# EAGLE board teensyv (EAGLE 6.6.0)
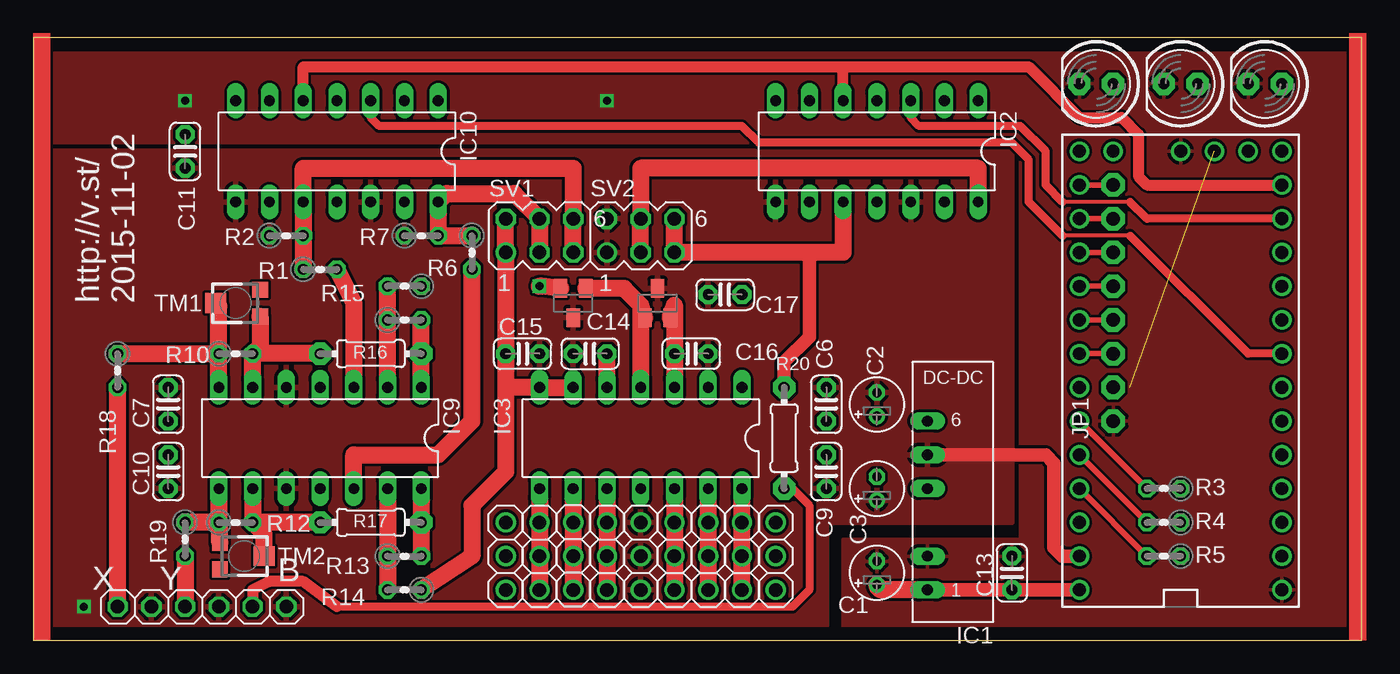
[diagram p0: board, top side]
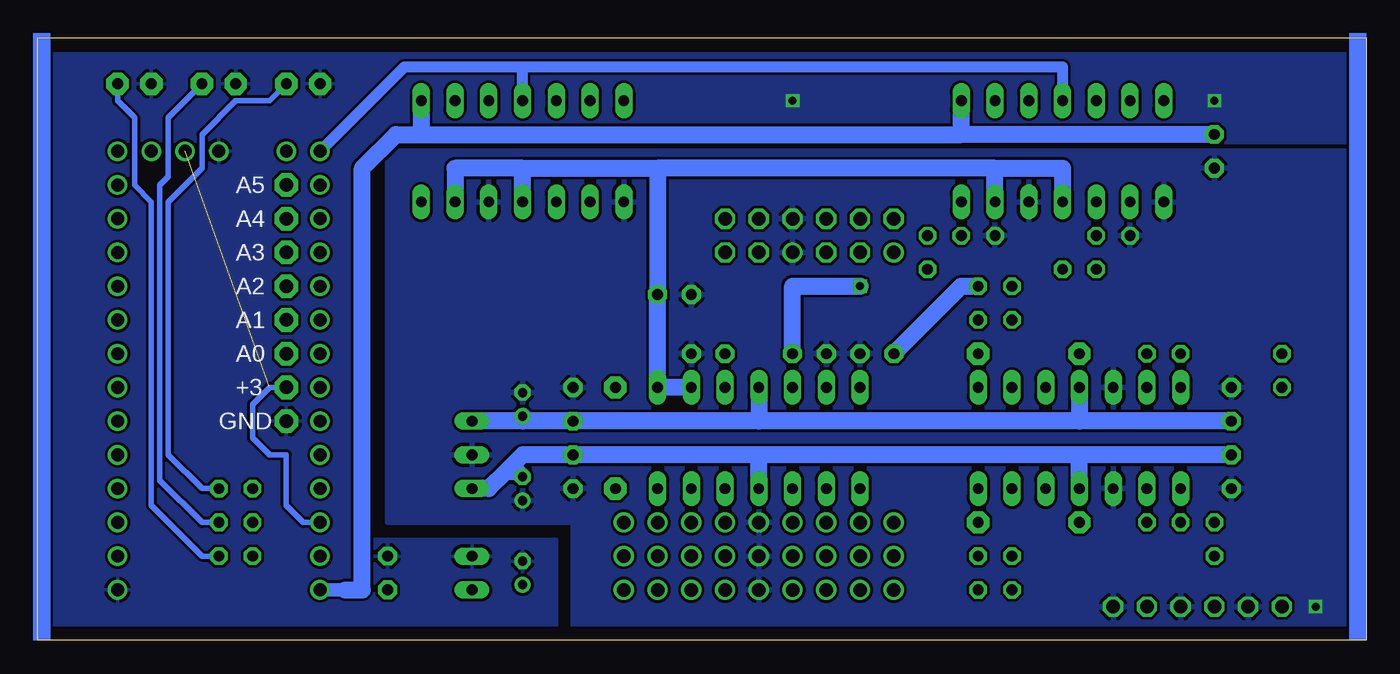
[diagram p1: board, bottom side, seen from below]

Size 100 x 45.39 mm. Coordinates in mm from the lower left corner, seen from the top.
Outline: 0,0 100,0 100,45.39 0,45.39 0,0
Copper layers (1*16): Top 0.035mm / dielectric 1.5mm / Bottom 0.035mm
Design rules "default": minimum track width 10mil, minimum drill 24mil, track to track 8mil, track to pad 8mil, pad to pad 8mil, via to via 8mil, smd to smd 8mil, copper to edge 40mil, drill to drill 8mil, minimum pad ring 10mil, minimum via ring 8mil, stop-mask expansion 4mil, vias tented up to drill 0mil, thermal gap 10mil

## Footprints (pad centres in the part's own frame; a part is rotated, then mirrored left to right if it is on the bottom)
E1,8-4 = drill 0.711 pad 1.168: + -0.889,0 | drill 0.711 pad 1.168 octagon: - 0.889,0
C025-024X044 = drill 0.813 pad 1.422 octagon: 1 -1.27,0; 2 1.27,0
NMA = drill 0.813 long: 1 0,6.35; 2 0,3.81; 4 0,-1.27; 5 0,-3.81; 6 0,-6.35
DIL14 = drill 0.813 long: 1 -7.62,-3.81; 2 -5.08,-3.81; 3 -2.54,-3.81; 4 0,-3.81; 5 2.54,-3.81; 6 5.08,-3.81; 7 7.62,-3.81; 8 7.62,3.81; 9 5.08,3.81; 10 2.54,3.81; 11 0,3.81; 12 -2.54,3.81; 13 -5.08,3.81; 14 -7.62,3.81
SOT23 = smd 1 x 1.4: 1 -0.95,-1.1; 2 0.95,-1.1; 3 0,1.1
1X08-CLEANBIG = drill 1.016 pad 1.778 octagon: 1 -8.89,0; 2 -6.35,0; 3 -3.81,0; 4 -1.27,0; 5 1.27,0; 6 3.81,0; 7 6.35,0; 8 8.89,0
1X03 = drill 1.016: 1 -2.54,0; 2 0,0; 3 2.54,0
LED5MM = drill 0.813 pad 1.676 octagon: A -1.27,0; K 1.27,0
0204V = drill 0.813 octagon: 1 -1.27,0; 2 1.27,0
0204/7 = drill 0.813 pad 1.676 octagon: 1 -3.81,0; 2 3.81,0
MA03-2 = drill 1.016: 1 -2.54,-1.27 | drill 1.016 octagon: 2 -2.54,1.27; 3 0,-1.27; 4 0,1.27; 5 2.54,-1.27; 6 2.54,1.27
TC33X = smd 1.2 x 1.2: 1 -1,-1.825; 3 1,-1.825 | smd 1.5 x 1.6: 2 0,1.5
TEENSY_3.0_BASIC-PGM = drill 0.965: 0 -7.62,13.97; 1 -7.62,11.43; 2 -7.62,8.89; 3 -7.62,6.35; 3.3V 7.62,11.43; 3.3V1 -2.54,-16.51; 4 -7.62,3.81; 5 -7.62,1.27; 6 -7.62,-1.27; 7 -7.62,-3.81; 8 -7.62,-6.35; 9 -7.62,-8.89; 10 -7.62,-11.43; 11 -7.62,-13.97; 12 -7.62,-16.51; 13 7.62,-16.51; 14/A0 7.62,-13.97; 15/A1 7.62,-11.43; 16/A2 7.62,-8.89; 17/A3 7.62,-6.35; 18/A4 7.62,-3.81; 19/A5 7.62,-1.27; 20/A6 7.62,1.27; 21/A7 7.62,3.81; 22/A8 7.62,6.35; 23/A9 7.62,8.89; AGND 7.62,13.97; GND -7.62,16.51; GND1 0,-16.51; RESET 5.08,-16.51; VBAT -5.08,-16.51; VIN 7.62,16.51
1X06 = drill 1.016 octagon: 1 -6.35,0; 2 -3.81,0; 3 -1.27,0; 4 1.27,0; 5 3.81,0; 6 6.35,0

## Placement (x,y rotation side)
C1  4.7uF  [E1,8-4]  63.5,5.08 90 top
C2  4.7uF  [E1,8-4]  63.5,17.78 90 top
C3  4.7uF  [E1,8-4]  63.5,11.43 90 top
C6  0.1uF  [C025-024X044]  59.69,17.78 90 top
C7  0.1uF  [C025-024X044]  10.16,17.78 90 top
C9  0.1uF  [C025-024X044]  59.69,12.7 90 top
C10  0.1uF  [C025-024X044]  10.16,12.7 90 top
C11  0.1uF  [C025-024X044]  11.43,36.83 270 top
C13  0.1uF  [C025-024X044]  73.66,5.08 90 top
C14  1.0uF  [C025-024X044]  41.91,21.59 180 top
C15  1.0uF  [C025-024X044]  36.83,21.59 0 top
C16  1.0uF  [C025-024X044]  49.53,21.59 0 top
C17  1.0uF  [C025-024X044]  52.07,26.04 180 top
IC1  RB-0512D  [NMA]  67.31,10.16 180 top
IC2  MCP4922-E/P  [DIL14]  63.5,36.83 180 top
IC2.5  MAX6102  [SOT23]  40.64,25.4 180 top
IC3  QUAD_OPAMPP  [DIL14]  45.72,15.24 180 top
IC5  MAX6105  [SOT23]  46.99,25.4 0 top
IC9  QUAD_OPAMPP  [DIL14]  21.59,15.24 180 top
IC10  MCP4922-E/P  [DIL14]  22.86,36.83 180 top
JP1  [1X08-CLEANBIG]  81.28,25.4 90 top
JP2  [1X03]  43.18,6.35 90 top
JP3  [1X03]  40.64,6.35 270 top
JP4  [1X03]  48.26,6.35 90 top
JP5  [1X03]  50.8,6.35 90 top
JP6  [1X03]  53.34,6.35 90 top
JP7  [1X03]  55.88,6.35 90 top
JP8  [1X03]  38.1,6.35 90 top
JP9  [1X03]  35.56,6.35 90 top
JP10  [1X03]  45.72,6.35 90 top
LED1  [LED5MM]  80.01,41.91 180 top
LED2  [LED5MM]  86.36,41.91 180 top
LED3  [LED5MM]  92.71,41.91 180 top
R1  10k  [0204V]  21.59,27.94 0 top
R2  10k  [0204V]  19.05,30.48 0 top
R3  400R  [0204V]  85.09,11.43 180 top
R4  400R  [0204V]  85.09,8.89 180 top
R5  400R  [0204V]  85.09,6.35 180 top
R6  10k  [0204V]  33.02,29.21 270 top
R7  10k  [0204V]  29.21,30.48 0 top
R10  10k  [0204V]  15.24,21.59 0 top
R11  10k  [0204V]  27.94,24.13 0 top
R12  10k  [0204V]  15.24,8.89 0 top
R13  10k  [0204V]  27.94,6.35 0 top
R14  10k  [0204V]  27.94,3.81 180 top
R15  10k  [0204V]  27.94,26.67 180 top
R16  [0204/7]  25.4,21.59 180 top
R17  [0204/7]  25.4,8.89 180 top
R18  75r  [0204V]  6.35,20.32 270 top
R19  75r  [0204V]  11.43,7.62 270 top
R20  [0204/7]  56.52,15.24 270 top
SV1  [MA03-2]  38.1,30.48 0 top
SV2  [MA03-2]  45.72,30.48 0 top
TM1  [TC33X]  15.24,25.4 90 top
TM2  [TC33X]  15.88,6.35 270 top
U$1  TEENSY_3.0_BASIC-PGM  [TEENSY_3.0_BASIC-PGM]  86.36,20.32 180 top
VECTREX  [1X06]  12.7,2.54 0 top

## Library data of the parts
C1-C3 = rcl
C6 C7 C9-C11 C13-C17 IC3 IC9 JP1-JP10 LED1-LED3 R1-R7 R10-R20 TM1 TM2 VECTREX = adafruit
IC1 = dc-dc-converter
IC2 IC10 = nh-ic
IC2.5 IC5 = maxim
SV1 SV2 = con-lstb; OC_FARNELL: unknown; OC_NEWARK: unknown
U$1 = Teensy3.0 2

## Nets
!SS0: IC2.3 U$1.10
!SS1: IC10.3 U$1.6
+3V: JP1.2 U$1.3.3V U$1.3.3V1
+5V: C1.+ C11.1 C13.1 IC1.1 IC2.1 IC10.1 U$1.VIN
+12V: C2.+ C6.1 C7.1 IC1.6 IC2.5.1 IC3.4 IC5.1 IC9.4
-12V: C3.- C9.2 C10.2 IC1.4 IC3.11 IC9.11
A0: JP1.8 U$1.14/A0
A1: JP1.7 U$1.15/A1
A2: JP1.6 U$1.16/A2
A3: JP1.5 U$1.17/A3
A4: JP1.4 U$1.18/A4
A5: JP1.3 U$1.19/A5
A6: U$1.20/A6
AGND: C2.- C3.+ C6.2 C7.2 C9.1 C10.1 C11.2 C14.2 C15.2 C16.2 C17.2 IC1.5 IC2.5.3 IC2.8 IC2.12 IC5.3 IC9.5 IC9.10 IC10.8 IC10.12 JP10.1 JP10.2 JP10.3 R2.1 R7.1 SV2.1 SV2.2 U$1.AGND VECTREX.2 VECTREX.4 VECTREX.6
DACW: IC2.14 SV2.3 SV2.4
DACX: IC10.10 R1.1 R2.2 SV1.5 SV1.6
DACY: IC10.14 R6.1 R7.2 SV1.3 SV1.4
DACZ: IC2.10 R20.1 SV2.5 SV2.6
DIN: IC2.5 IC10.5 U$1.11
GND: C1.- C13.2 IC1.2 JP1.1 LED1.K LED2.K LED3.K U$1.GND U$1.GND1
LED1: R3.2 U$1.21/A7
LED2: R4.2 U$1.22/A8
LED3: R5.2 U$1.23/A9
N$1: C14.1 IC2.5.2 IC3.5
N$2: IC9.3 R1.2
N$3: C16.1 IC3.3 IC5.2
N$4: IC3.13 JP5.1 JP5.2 JP5.3
N$5: IC3.12 JP4.1 JP4.2 JP4.3
N$6: IC3.14 JP6.1 JP6.2 JP6.3
N$7: LED1.A R3.1
N$8: IC9.1 R11.2 R16.1
N$9: IC9.12 R6.2
N$10: IC9.2 R11.1 R15.2
N$11: LED2.A R4.1
N$12: LED3.A R5.1
N$13: IC9.7 R10.1 R18.1 TM1.2
N$14: IC9.8 R12.1 R19.1 TM2.1
N$15: IC9.14 R13.2 R17.1
N$16: IC9.9 R12.2 R17.2 TM2.2
N$17: IC9.6 R10.2 R16.2 TM1.1
N$18: IC3.9 JP3.1 JP3.2 JP3.3
N$19: IC3.10 JP2.1 JP2.2 JP2.3
N$20: IC3.8 JP8.1 JP8.2 JP8.3
N$23: R20.2 VECTREX.5
SCK: IC2.4 IC10.4 U$1.13
VBAT: U$1.VBAT
VREF2.5: C15.1 IC3.6 IC3.7 R14.1 R15.1 SV1.1 SV1.2
VREF5: C17.1 IC2.11 IC2.13 IC3.1 IC3.2 IC10.11 IC10.13
X+: R18.2 VECTREX.1
Y+: R19.2 VECTREX.3
YFB: IC9.13 R13.1 R14.2

## Tracks (layer width: path | path; a pad name or v marks a point on that pad's centre or on a via)
!SS0
  Top 0.305: 82.55,33.02 77.47,33.02
  Top 0.61: U$1.10 83.82,31.75 82.55,33.02 | 77.47,33.02 76.2,34.29 76.2,36.83 74.3,38.73 66.67,38.73 66.04,39.37 IC2.3
!SS1
  Top 0.305: 82.55,30.48 77.47,30.48
  Top 0.61: U$1.6 91.44,21.59 82.55,30.48 | 77.47,30.48 74.93,33.02 74.93,36.2 73.66,37.47 54.61,37.47 53.34,38.73 26.04,38.73 25.4,39.37 IC10.3
+3V  (1 unrouted)
  Bottom 0.406: U$1.3.3V 80.01,8.89 81.28,10.16 81.28,13.97 82.55,13.97 83.82,15.24 83.82,17.78 82.55,19.05 JP1.2
+5V
  Top 1.016: IC1.1 C13.1 U$1.VIN
  Top 1.27: IC1.1 63.88,3.81 arc-90 C1.+
  Bottom 1.016: 76.83,3.81 U$1.VIN
  Bottom 1.27: IC2.1 71.12,38.1 | 71.12,38.1 30.48,38.1 | 30.48,38.1 IC10.1 | C11.1 30.48,38.1 | 76.83,3.81 75.56,3.81 75.56,35.56 73.03,38.1 71.12,38.1
+12V
  Top 1.27: IC5.1 45.72,25.25 | 45.72,25.25 IC3.4 | 45.72,25.25 44.47,26.5 IC2.5.1
  Bottom 1.27: C7.1 21.59,16.51 | 21.59,16.51 45.72,16.51 | 45.72,16.51 C6.1 63.5,16.51 | IC3.4 45.72,16.51 | IC9.4 21.59,16.51 | 63.5,16.51 IC1.6 | C2.+ 63.5,16.51
-12V
  Bottom 1.27: C10.2 21.59,13.97 | 21.59,13.97 45.72,13.97 | 45.72,13.97 C9.2 63.5,13.97 64.77,12.7 | IC3.11 45.72,13.97 | IC9.11 21.59,13.97 | 64.77,12.7 66.04,11.43 IC1.4 | C3.- 63.88,12.7 64.77,12.7
A0
  Top 0.406: U$1.14/A0 JP1.8
A1
  Top 0.406: U$1.15/A1 JP1.7
A2
  Top 0.406: U$1.16/A2 JP1.6
A3
  Top 0.406: U$1.17/A3 JP1.5
A4
  Top 0.406: U$1.18/A4 JP1.4
A5
  Top 0.406: U$1.19/A5 JP1.3
AGND  (via drill 0.6)
  Top 1.016: U$1.AGND 77.47,6.35 76.83,6.99 76.83,13.34 76.2,13.97 IC1.5
  other vias: 3.81,2.54
  pour Bottom: 1.27,36.83 73.66,36.83 73.66,8.89 59.69,8.89 59.69,0 1.27,0
  pour Top: 1.27,36.83 73.66,36.83 73.66,8.89 59.69,8.89 59.69,0 1.27,0
DACW
  Top 1.27: SV2.3 SV2.4 45.72,35.56 71.12,35.56 IC2.14
DACX
  Top 1.27: R1.1 R2.2 IC10.10 20.32,35.56 40.64,35.56 SV1.6 SV1.5
DACY
  Top 1.27: R6.1 R7.2 IC10.14 31.11,33.66 36.2,33.66 SV1.4 SV1.3
DACZ
  Top 1.016: R20.1 56.52,20.95 58.42,22.86 58.42,29.21
  Top 1.27: SV2.6 SV2.5 58.42,29.21 60.96,29.21 IC2.10
DIN
  Top 0.813: IC10.5 20.32,43.18 60.96,43.18 | IC2.5 60.96,43.18 | 60.96,43.18 74.93,43.18 78.74,39.37 81.92,39.37 83.19,38.1 83.19,34.92 83.82,34.29 U$1.11
GND  (via drill 0.6)
  other vias: 11.43,40.64 43.18,40.64
  pour Bottom: 1.27,44.45 99.06,44.45 99.06,-1.27 60.96,-1.27 60.96,7.62 74.93,7.62 74.93,37.47 1.27,37.47
  pour Top: 1.27,44.45 99.06,44.45 99.06,-1.27 60.96,-1.27 60.96,7.62 74.3,7.62 74.3,37.47 1.27,37.47
LED1
  Top 0.406: U$1.21/A7 R3.2
LED2
  Top 0.406: U$1.22/A8 R4.2
LED3
  Top 0.406: U$1.23/A9 R5.2
N$1  (via drill 0.6)
  Top 1.27: IC3.5 C14.1 | IC2.5.2 38.25,26.67 v38.1,26.67
  Bottom 1.27: C14.1 43.18,26.67 v38.1,26.67
N$2
  Top 1.27: R1.2 24.13,25.4 IC9.3
N$3
  Top 1.27: IC5.2 48.26,25.25 C16.1 IC3.3
N$4
  Top 1.27: IC3.13 JP5.3 JP5.2 JP5.1
N$5
  Top 1.27: IC3.12 JP4.3 JP4.2 JP4.1
N$6
  Top 1.27: JP6.1 JP6.2 JP6.3 IC3.14
N$7
  Bottom 0.406: LED1.A 82.55,40.64 85.09,40.64 87.63,38.1 87.63,35.56 90.17,33.02 90.17,13.97 87.63,11.43 R3.1
N$8
  Top 1.27: IC9.1 R16.1 R11.2
N$9
  Top 1.27: IC9.12 24.13,13.97 30.48,13.97 33.02,16.51 R6.2
N$10
  Top 1.27: IC9.2 R11.1 R15.2
N$11
  Bottom 0.406: R4.1 87.63,8.89 90.81,12.06 90.81,34.29 90.17,34.92 90.17,39.37 LED2.A
N$12
  Bottom 0.406: LED3.A 93.98,40.64 92.71,39.37 92.71,34.29 91.44,33.02 91.44,10.16 87.63,6.35 R5.1
N$13
  Top 1.27: IC9.7 R10.1 | R18.1 R10.1 | R10.1 13.97,25.17 TM1.2
N$14
  Top 1.27: IC9.8 R12.1 | R12.1 R19.1 | TM2.1 14.05,8.81 R12.1
N$15
  Top 1.27: IC9.14 R17.1 R13.2
N$16
  Top 1.27: IC9.9 R12.2 | R17.2 R12.2 | TM2.2 17.38,8.03 R12.2
N$17
  Top 1.27: IC9.6 R10.2 | TM1.1 17.07,22.14 R10.2 | R16.2 R10.2
N$18
  Top 1.27: IC3.9 JP3.1 JP3.2 JP3.3
N$19
  Top 1.27: IC3.10 JP2.3 JP2.2 JP2.1
N$20
  Top 1.27: IC3.8 JP8.3 JP8.2 JP8.1
N$23
  Top 0.61: R20.2 57.15,11.43 58.42,10.16 58.42,3.81 57.15,2.54 22.86,2.54
  Top 0.813: 22.86,2.54 20.32,4.45 17.78,4.45 16.51,3.81 VECTREX.5
SCK
  Bottom 0.813: U$1.13 72.39,43.18 63.5,43.18 | 63.5,43.18 22.86,43.18 IC10.4 | IC2.4 63.5,43.18
VREF2.5
  Top 1.27: 35.56,19.05 C15.1 SV1.1 SV1.2 | 35.56,19.05 35.56,12.7 33.02,10.16 33.02,6.35 R14.1 | IC3.6 IC3.7 35.56,19.05
  Bottom 1.27: C15.1 30.48,26.67 R15.1
VREF5
  Bottom 1.27: 63.5,35.56 53.34,35.56 | 27.94,35.56 22.86,35.56 IC10.11 | IC10.13 27.94,35.56 | 63.5,35.56 68.58,35.56 IC2.13 | IC2.11 63.5,35.56 | IC3.2 IC3.1 C17.1 53.34,35.56 | 27.94,35.56 53.34,35.56
X+
  Top 1.27: VECTREX.1 R18.2
Y+
  Top 1.27: R19.2 VECTREX.3
YFB
  Top 1.27: IC9.13 R13.1 R14.2
(copper drawn outside any net)
  shapes: Bottom area x2, Top area x2

## Text on the board
tNames: http://v.st/ / 2015-11-02 | X | Y | B
bNames: A5 | A4 | A3 | A2 | A1 | A0 | +3 | GND